# Altium PCB iCE5UL1-4K-SG48-DKE.PcbDoc
Units mm, origin at the board's own origin, x right, y up, seen from the top; angles counter-clockwise.
Board outline 80 x 100 mm, 2 copper layers (Top Layer, Bottom Layer); 112 components, 94 nets, 429 pads, 155 vias.
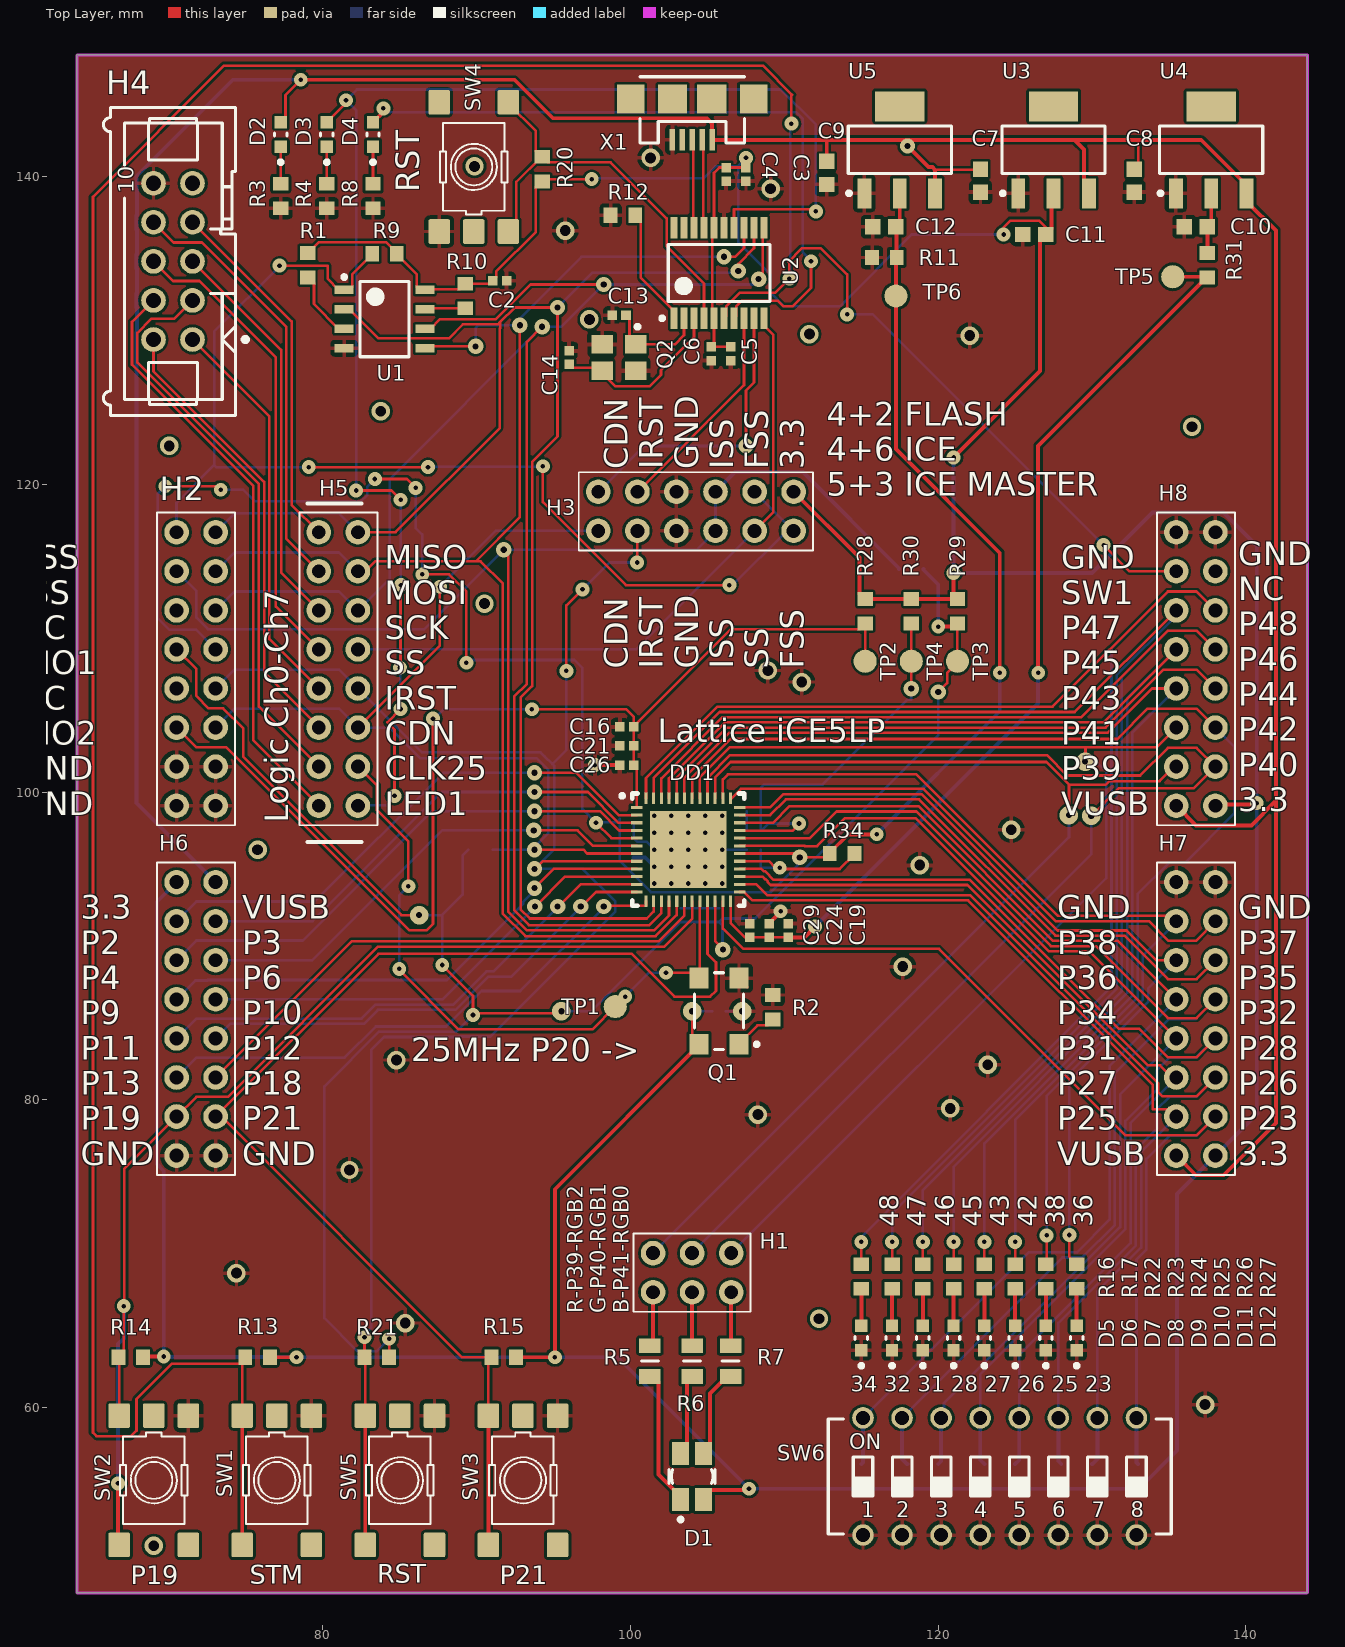
[diagram p0: Top Layer view]
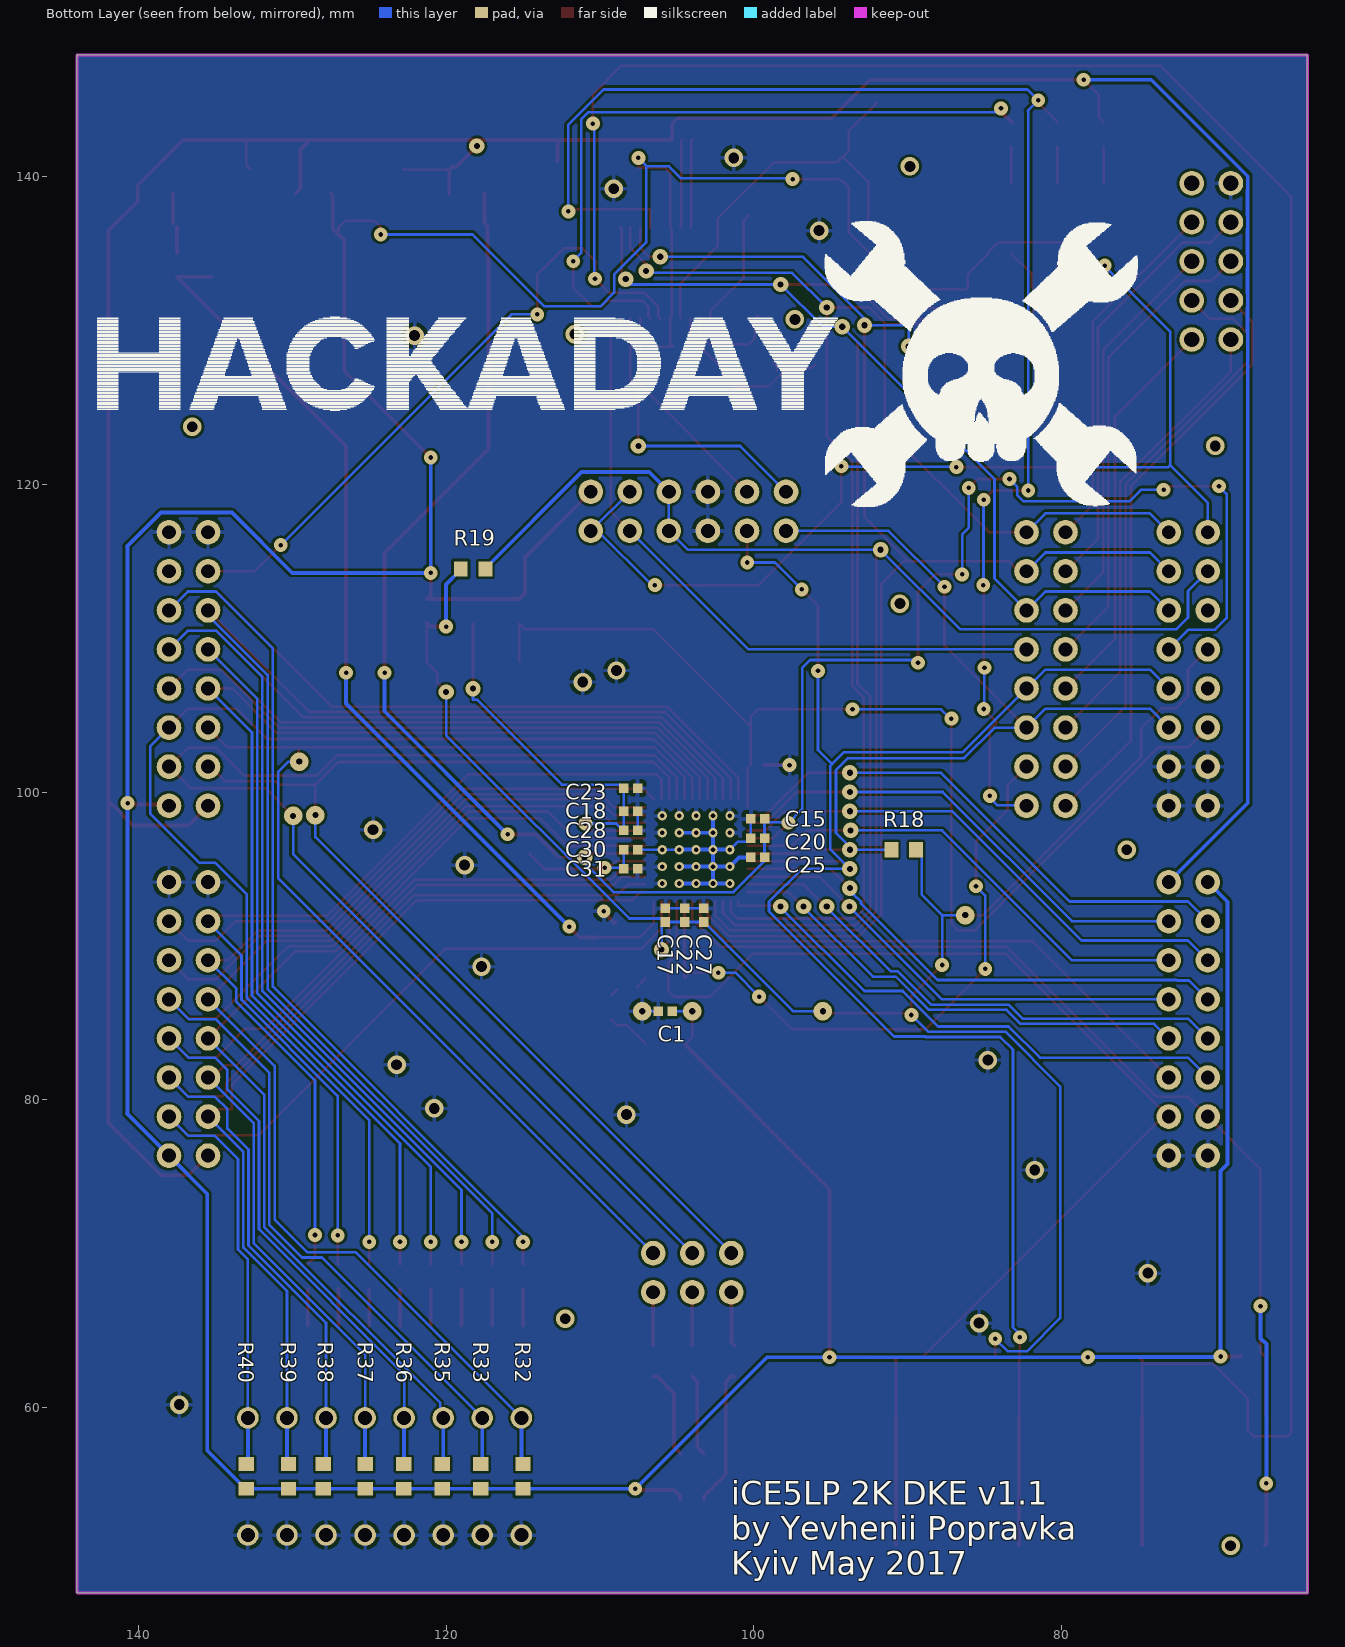
[diagram p1: Bottom Layer view, seen from below]
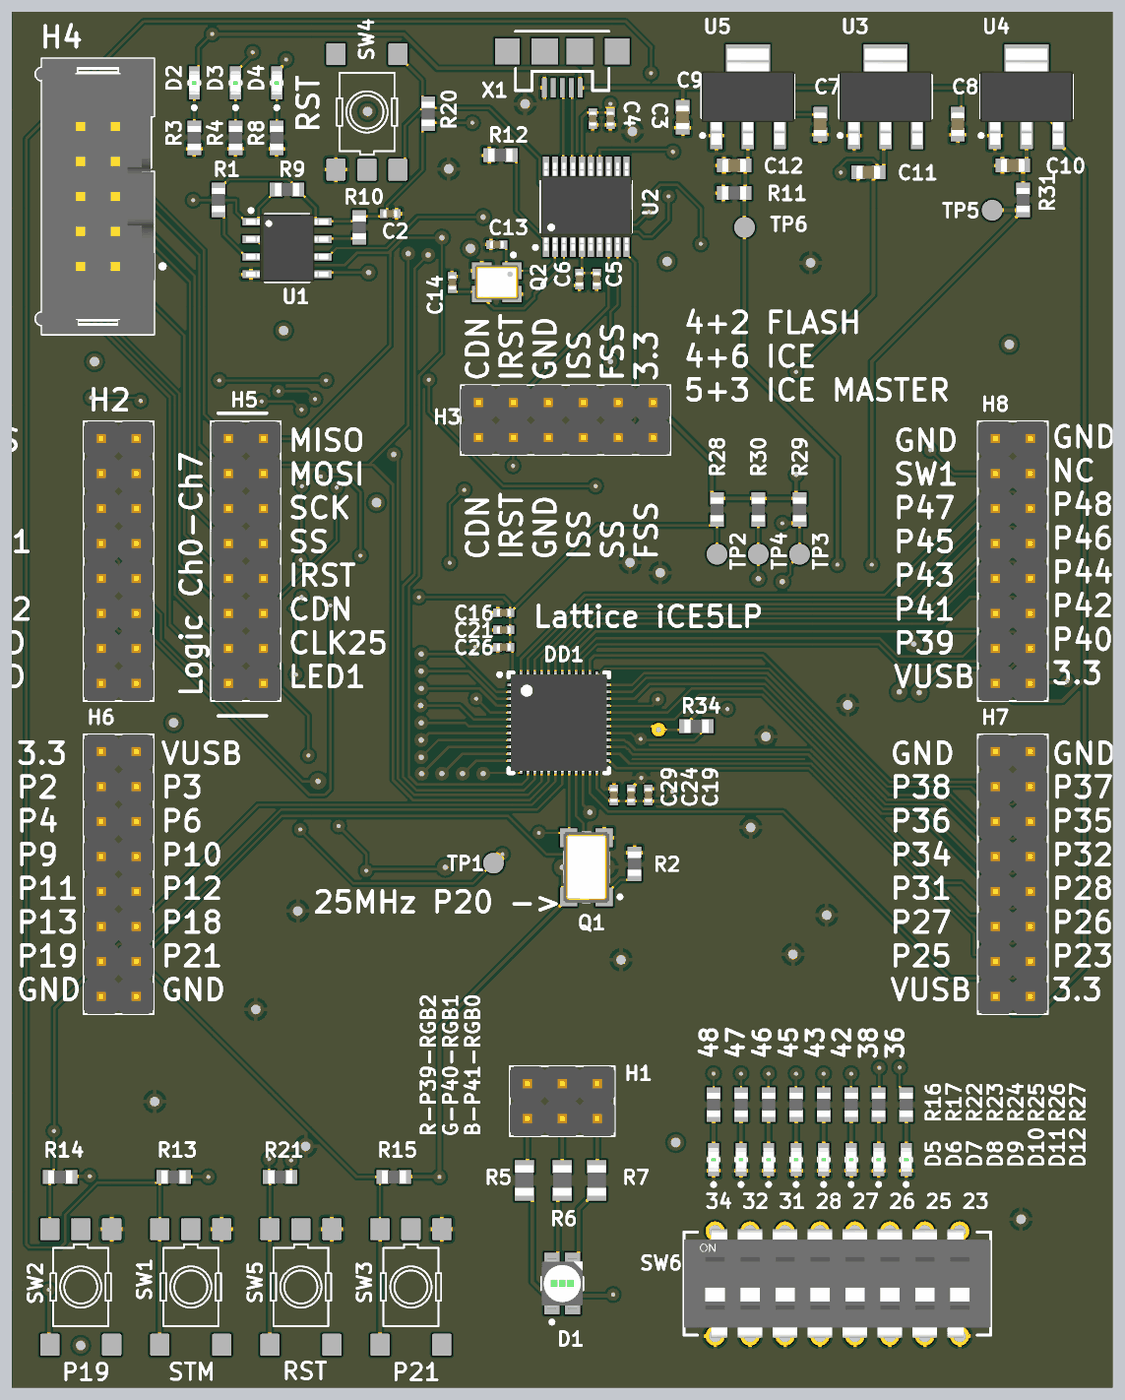
[diagram p2: 3D render of the assembled board from above, using the file's embedded part models]
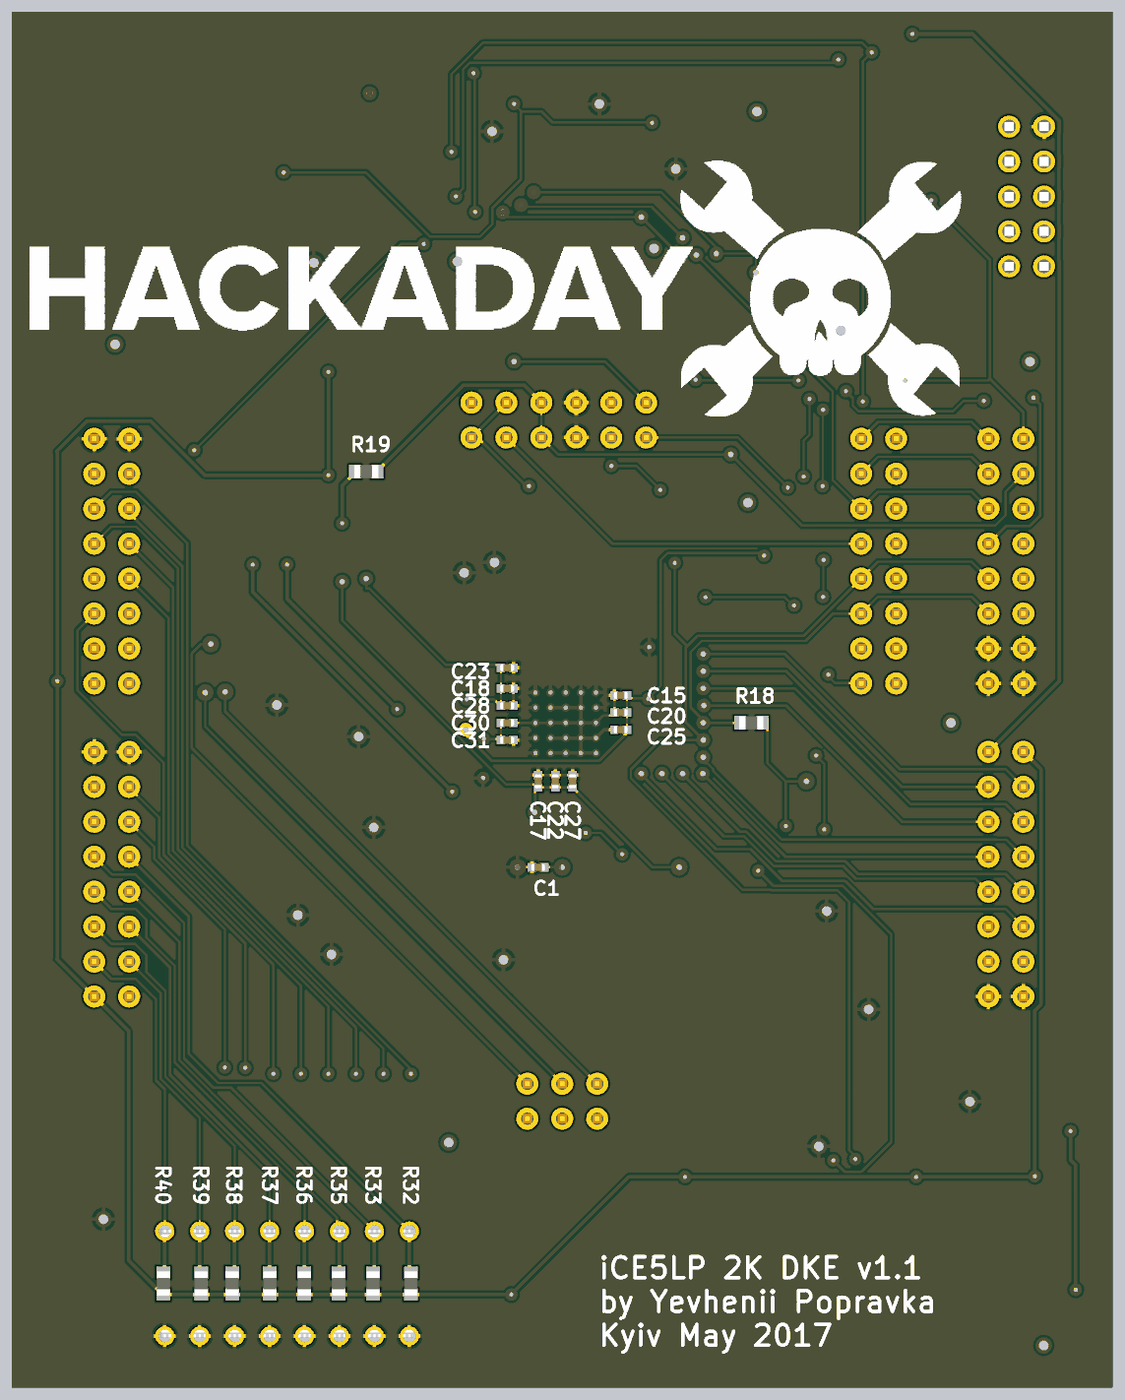
[diagram p3: 3D render of the assembled board from below, using the file's embedded part models]

## Layer stack, top to bottom
Top Solder: solder mask 0.0102, Solder Resist, Dk 3.5
Top Layer: signal copper 0.0356
Dielectric 1: dielectric 0.32, FR-4, Dk 4.8
Bottom Layer: signal copper 0.0356
Bottom Solder: solder mask 0.0102, Solder Resist, Dk 3.5

## Board outline
64,47.925 64,147.925 143.975,147.925 144,147.9 144,47.95 143.975,47.925

## Design rules (kind name [scope] priority, off if disabled: settings)
Clearance [All] p1: gap=0.17 ignorepadtopadclearanceinfootprint=FALSE
MinimumSolderMaskSliver [All] p1: minsoldermaskwidth=0.01
PolygonConnect [All] p1: connectstyle=Relief reliefconductorwidth=0.254 reliefentries=4 polygonreliefangle="90 Angle" airgapwidth=0.254
RoomDefinition Main [InComponentClass('Main')] p1: confinementstyle=ConfineIn formatcopy=TRUE lockcomponents=FALSE outline 53.8,22.874 810.567,22.874 810.567,159.526 53.8,159.526
RoutingVias [All] p1: holewidth=0.4 width=1 viastyle="Through Hole" minholewidth=0.3 minwidth=0.9 maxholewidth=0.4 maxwidth=1.2
SilkToSilkClearance [All] p1: silktosilkclearance=0.01
SilkToSolderMaskClearance [IsPad] p1: minsilkscreentomaskgap=0.01 clearancetoexposedcopper=TRUE
SolderMaskExpansion [All] p1: expansion=0.102
Width [All] p1: maxlimit=0.254 minlimit=0.17 preferedwidth=0.17
27 further rules are at their usual default settings.

## Components (designator, comment, footprint, x,y, rotation, side; value= is the part's Value field where it differs from the comment)
C1 "10n" CAPC1005X55N 105.75,85.75 r180 bottom
C2 "100n" CAPC1005X55N 91.5,133.25 r0 top
C3 "1u" CAPC1005X55N 107.5,140.15 r90 top
C4 "100n" CAPC1005X55N 106.225,140.15 r90 top
C5 "1u" CAPC1005X55N 106.5,128.5 r90 top
C6 "100n" CAPC1005X55N 105.25,128.5 r90 top
C7 "100n" CAPC1608X85N 122.75,139.75 r90 top
C8 "100n" CAPC1608X85N 132.75,139.75 r90 top
C9 "100n" CAPC1608X85N 112.75,140.25 r90 top
C10 "1u" CAPC1608X85N 136.75,136.75 r0 top
C11 "1u" CAPC1608X85N 126.25,136.25 r0 top
C12 "1u" CAPC1608X85N 116.5,136.75 r0 top
C13 "10p" CAPC1005X55N 99.25,131 r180 top
C14 "10p" CAPC1005X55N 96,128.25 r270 top
C15 "1u" CAPC1005X55N 99.75,98.25 r180 bottom
C16 "1u" CAPC1005X55N 99.75,104.25 r0 top
C17 "1u" CAPC1005X55N 105.75,92 r270 bottom
C18 "1u" CAPC1005X55N 108,98.75 r0 bottom
C19 "1u" CAPC1005X55N 110.25,91 r270 top
C20 "100n" CAPC1005X55N 99.75,97 r180 bottom
C21 "100n" CAPC1005X55N 99.75,103 r0 top
C22 "100n" CAPC1005X55N 104.5,92 r270 bottom
C23 "100n" CAPC1005X55N 108,100.25 r0 bottom
C24 "100n" CAPC1005X55N 109,91 r270 top
C25 "10n" CAPC1005X55N 99.75,95.75 r180 bottom
C26 "10n" CAPC1005X55N 99.75,101.75 r0 top
C27 "10n" CAPC1005X55N 103.25,92 r270 bottom
C28 "10n" CAPC1005X55N 108,97.5 r0 bottom
C29 "10n" CAPC1005X55N 107.75,91 r270 top
C30 "100n" CAPC1005X55N 108,96.25 r0 bottom
C31 "10n" CAPC1005X55N 108,95 r0 bottom
D1 "Red/Green/Blue" LED_CREE_CLV1A-FKB 104,55.5 r90 top
D2 "Green" LED_OSRAM_LGL29K 77.25,142.75 r90 top
D3 "Green" LED_OSRAM_LGL29K 80.25,142.75 r90 top
D4 "Green" LED_OSRAM_LGL29K 83.25,142.75 r90 top
D5 "Green" LED_OSRAM_LGL29K 115,64.5 r90 top
D6 "Green" LED_OSRAM_LGL29K 117,64.5 r90 top
D7 "Green" LED_OSRAM_LGL29K 119,64.5 r90 top
D8 "Green" LED_OSRAM_LGL29K 121,64.5 r90 top
D9 "Green" LED_OSRAM_LGL29K 123,64.5 r90 top
D10 "Green" LED_OSRAM_LGL29K 125,64.5 r90 top
D11 "Green" LED_OSRAM_LGL29K 127,64.5 r90 top
D12 "Green" LED_OSRAM_LGL29K 129,64.5 r90 top
DD1 "ICE5LP2K" QFN50P700X700X100_HS-49L 103.75,96.25 r0 top locked
H1 "H-2x3" J2x3 104,68.75 r0 top locked
H2 "H-2x8" J2x8 71.75,108 r90 top locked
H3 "H-2x6" J2x6 104.25,118.25 r180 top locked
H4 "Header 10" 3M_N2510-6002RB 70.25,134.5 r90 top
H5 "H-2x8" J2x8 81,108 r270 top locked
H6 "H-2x8" J2x8 71.75,85.25 r270 top locked
H7 "H-2x8" J2x8 136.75,85.25 r90 top locked
H8 "H-2x8" J2x8 136.75,108 r90 top locked
Q1 "25MHz" OSCCC320X500X160-4N 105.75,85.75 r180 top
Q2 "114.285MHZ" XTAL_CONNOR_CS 99.25,128.25 r270 top
R1 "10k" RESC1608X55N 79,134.25 r270 top
R2 "inf" RESC1608X55N 109.25,86 r270 top
R3 "1k" RESC1608X55N 77.25,138.75 r90 top
R4 "1k" RESC1608X55N 80.25,138.75 r90 top
R5 "470" RESC2012X60N 101.25,63 r90 top
R6 "470" RESC2012X60N 104,63 r90 top
R7 "470" RESC2012X60N 106.5,63 r90 top
R8 "1k" RESC1608X55N 83.25,138.75 r90 top
R9 "10k" RESC1608X55N 84,135 r0 top
R10 "10k" RESC1608X55N 89.25,132.25 r270 top
R11 "120" RESC1608X55N 116.5,134.75 r0 top
R12 "10k" RESC1608X55N 99.5,137.5 r0 top
R13 "10k" RESC1608X55N 75.75,63.25 r180 top
R14 "10k" RESC1608X55N 67.5,63.25 r180 top
R15 "10k" RESC1608X55N 91.75,63.25 r180 top
R16 "1k" RESC1608X55N 115,68.5 r270 top
R17 "1k" RESC1608X55N 117,68.5 r270 top
R18 "10k" RESC1608X55N 90.25,96.25 r0 bottom
R19 "10k" RESC1608X55N 118.25,114.5 r180 bottom
R20 "10k" RESC1608X55N 94.25,140.5 r90 top
R21 "10k" RESC1608X55N 83.5,63.25 r180 top
R22 "1k" RESC1608X55N 119,68.5 r270 top
R23 "1k" RESC1608X55N 121,68.5 r270 top
R24 "1k" RESC1608X55N 123,68.5 r270 top
R25 "1k" RESC1608X55N 125,68.5 r270 top
R26 "1k" RESC1608X55N 127,68.5 r270 top
R27 "1k" RESC1608X55N 129,68.5 r270 top
R28 "0" RESC1608X55N 115.25,111.75 r90 top
R29 "0" RESC1608X55N 121.25,111.75 r90 top
R30 "0" RESC1608X55N 118.25,111.75 r90 top
R31 "0" RESC1608X55N 137.5,134.25 r90 top
R32 "10k" RESC1608X55N 115,55.5 r90 bottom
R33 "10k" RESC1608X55N 117.75,55.5 r90 bottom
R34 "100" RESC1608X55N 113.75,96 r180 top
R35 "10k" RESC1608X55N 120.25,55.5 r90 bottom
R36 "10k" RESC1608X55N 122.75,55.5 r90 bottom
R37 "10k" RESC1608X55N 125.25,55.5 r90 bottom
R38 "10k" RESC1608X55N 128,55.5 r90 bottom
R39 "10k" RESC1608X55N 130.25,55.5 r90 bottom
R40 "10k" RESC1608X55N 133,55.5 r90 bottom
SW1 "TS42 Dongnan Electronics Tact switch VDC 12V - 50mA" TS42 77,55.25 r270 top
SW2 "TS42 Dongnan Electronics Tact switch VDC 12V - 50mA" TS42 69,55.25 r270 top
SW3 "TS42 Dongnan Electronics Tact switch VDC 12V - 50mA" TS42 93,55.25 r270 top
SW4 "TS42 Dongnan Electronics Tact switch VDC 12V - 50mA" TS42 89.806,140.641 r90 top
SW5 "TS42 Dongnan Electronics Tact switch VDC 12V - 50mA" TS42 85,55.25 r270 top
SW6 "Switch" SW_TYCO_1825057-7 124,55.5 r90 top
TP1 "TP" "TP no hole" 99,86.05 r0 top
TP2 "TP" "TP no hole" 115.25,108.5 r90 top
TP3 "TP" "TP no hole" 121.25,108.5 r90 top
TP4 "TP" "TP no hole" 118.25,108.5 r90 top
TP5 "TP" "TP no hole" 135.25,133.5 r90 top
TP6 "TP" "TP no hole" 117.25,132.25 r90 top
U1 "M25P80" SOIC127P600X175-8L 84,130.75 r0 top
U2 "STM32F070" SOP127P600-8N 105.75,133.75 r90 top
U3 "LD1117V33" SOT230P700X180-4L 127.5,141.75 r90 top
U4 "LD1117V33" SOT230P700X180-4L 137.75,141.75 r90 top
U5 "LD1117V33" SOT230P700X180-4L 117.5,141.75 r90 top
X1 "uUSB" USB-MICROB 104,145.05 r180 top

## Footprints (in the part's own frame and the unit in brackets; to place one, negate y for a bottom-side part, rotate by r counter-clockwise, add the part's x,y. Pads: shape width x height; smd on the part's side, far side on the other; paste and mask are expansions set on the pad)
3M_N2510-6002RB [mm] "10 Contacts - Straight .100\" x .100\" Low Profile Four-Wall Header"
  round 1.6 hole 1: 1(-5.08,-1.27) 2(-5.08,1.27) 3(-2.54,-1.27) 4(-2.54,1.27) 5(0,-1.27) 6(0,1.27) 7(2.54,-1.27) 8(2.54,1.27) 9(5.08,-1.27) 10(5.08,1.27)
  silkscreen extent -10.01,-4.85 10.01,4.52, body extent -10.01,-4.11 10.01,4.52, height 9.91
CAPC1005X55N [mm] "Chip Capacitor, Body 1.0x0.55mm, IPC Medium Density"
  rect 0.62x0.62 smd: 1(-0.45,0) 2(0.45,0)
  body extent -0.52,-0.27 0.53,0.28, height 0.55
CAPC1608X85N [mm] "Chip Capacitor, Body 1.6x0.8mm IPC Medium Density"
  rect 1x1 smd: 1(-0.75,0) 2(0.75,0)
  body extent -0.87,-0.47 0.88,0.48, height 0.85
J2x3 [mm]
  round 1.6 hole 0.9: 1(-2.54,-1.27) 2(-2.54,1.27) 3(0,-1.27) 4(0,1.27) 5(2.54,-1.27) 6(2.54,1.27)
  silkscreen extent -3.81,-2.54 3.81,2.54, body extent -3.81,-2.54 3.81,2.54, height 10.1
J2x6 [mm]
  round 1.6 hole 0.9: 1(-6.35,-1.27) 2(-6.35,1.27) 3(-3.81,-1.27) 4(-3.81,1.27) 5(-1.27,-1.27) 6(-1.27,1.27) 7(1.27,-1.27) 8(1.27,1.27) 9(3.81,-1.27) 10(3.81,1.27) 11(6.35,-1.27) 12(6.35,1.27)
  silkscreen extent -7.62,-2.54 7.62,2.54, body extent -7.62,-2.54 7.62,2.54, height 10.1
J2x8 [mm]
  round 1.6 hole 0.9: 1(-8.89,-1.27) 2(-8.89,1.27) 3(-6.35,-1.27) 4(-6.35,1.27) 5(-3.81,-1.27) 6(-3.81,1.27) 7(-1.27,-1.27) 8(-1.27,1.27) 9(1.27,-1.27) 10(1.27,1.27) 11(3.81,-1.27) 12(3.81,1.27) 13(6.35,-1.27) 14(6.35,1.27) 15(8.89,-1.27) 16(8.89,1.27)
  silkscreen extent -10.16,-2.54 10.16,2.54, body extent -10.16,-2.54 10.16,2.54, height 10.1
LED_CREE_CLV1A-FKB [mm] "PLCC4 3 in 1 Surface Mount Red/Green/Blue LED With Black Top Surface, Body 3.2mm X 2.8mm"
  rect 1.5x1.1 smd: 1(-1.5,0.75) 2(-1.5,-0.75) 3(1.5,-0.75) 4(1.5,0.75)
  silkscreen extent -2.92,-1.5 0.45,1.5, body extent -1.85,-1.5 1.85,1.5, height 2.1
LED_OSRAM_LGL29K [mm] "Green Chip LED, 2-Leads, Body 1.7x0.8mm, IPC Medium Density"
  rect 0.8x0.8 smd: 1(-0.8,0) 2(0.8,0)
  silkscreen extent -1.92,-0.4 0.1,0.4, body extent -0.85,-0.4 0.85,0.4, height 0.67
OSCCC320X500X160-4N [mm] "SMD Oscillator, Corner Convave, 4 pins, 5x3.2mm"
  rect 1.25x1.35 smd: 1(-1.3,2.15) 2(-1.3,-2.15) 3(1.3,-2.15) 4(1.3,2.15)
  silkscreen extent -2.58,-2.5 1.6,2.5, body extent -1.67,-2.57 1.68,2.58, height 1.6
QFN50P700X700X100_HS-49L [mm] "QFN, 48-Leads, Body 7.00x7.00mm, Pitch 0.50mm, Thermal Pad 5.40x5.40mm, IPC High Density"
  rect 0.75x0.2 smd: 1(-3.35,2.75) 2(-3.35,2.25) 3(-3.35,1.75) 4(-3.35,1.25) 5(-3.35,0.75) 6(-3.35,0.25) 7(-3.35,-0.25) 8(-3.35,-0.75) 9(-3.35,-1.25) 10(-3.35,-1.75) 11(-3.35,-2.25) 12(-3.35,-2.75) 25(3.35,-2.75) 26(3.35,-2.25) 27(3.35,-1.75) 28(3.35,-1.25) 29(3.35,-0.75) 30(3.35,-0.25) 31(3.35,0.25) 32(3.35,0.75) 33(3.35,1.25) 34(3.35,1.75) 35(3.35,2.25) 36(3.35,2.75)
  rect 0.2x0.75 smd: 13(-2.75,-3.35) 14(-2.25,-3.35) 15(-1.75,-3.35) 16(-1.25,-3.35) 17(-0.75,-3.35) 18(-0.25,-3.35) 19(0.25,-3.35) 20(0.75,-3.35) 21(1.25,-3.35) 22(1.75,-3.35) 23(2.25,-3.35) 24(2.75,-3.35) 37(2.75,3.35) 38(2.25,3.35) 39(1.75,3.35) 40(1.25,3.35) 41(0.75,3.35) 42(0.25,3.35) 43(-0.25,3.35) 44(-0.75,3.35) 45(-1.25,3.35) 46(-1.75,3.35) 47(-2.25,3.35) 48(-2.75,3.35)
  rect 5x5 smd: 49(0,0)
  silkscreen extent -4.42,-3.65 3.65,3.65, body extent -3.55,-3.55 3.55,3.55, height 1
RESC1608X55N [mm] "Chip Resistor, EIA 0603, Metric 1608, Body 1.6x0.8mm, IPC Medium Density"
  rect 0.9x1 smd: 1(-0.8,0) 2(0.8,0)
  body extent -0.87,-0.47 0.88,0.48, height 0.55
RESC2012X60N [mm] "Chip Resistor, EIA 0805, Metric 2012, Body 2.0x1.2mm, IPC Medium Density"
  rect 0.95x1.4 smd: 1(-1,0) 2(1,0)
  silkscreen extent 0,-0.55 0,0.55, body extent -1.1,-0.67 1.1,0.68, height 0.6
SOIC127P600X175-8L [mm] "SOIC, 8-Leads, Body 4.85x3.90mm, Pitch 1.27mm, IPC High Density"
  rect 1.25x0.55 smd: 1(-2.625,1.905) 2(-2.625,0.635) 3(-2.625,-0.635) 4(-2.625,-1.905) 5(2.625,-1.905) 6(2.625,-0.635) 7(2.625,0.635) 8(2.625,1.905)
  silkscreen extent -2.75,-2.45 1.6,2.85, body extent -3,-2.45 3,2.45, height 1.75
SOP127P600-8N [mm]
  rect 1.4x0.45 smd: 1(-2.95,2.925) 2(-2.95,2.275) 3(-2.95,1.625) 4(-2.95,0.975) 5(-2.95,0.325) 6(-2.95,-0.325) 7(-2.95,-0.975) 8(-2.95,-1.625) 9(-2.95,-2.275) 10(-2.95,-2.925) 11(2.95,-2.925) 12(2.95,-2.275) 13(2.95,-1.625) 14(2.95,-0.975) 15(2.95,-0.325) 16(2.95,0.325) 17(2.95,0.975) 18(2.95,1.625) 19(2.95,2.275) 20(2.95,2.925)
  silkscreen extent -3.07,-3.3 1.85,3.82, body extent -3.2,-3.3 3.2,3.3, height 1.2
SOT230P700X180-4L [mm] "SOT223, 4-Leads, Body 6.50x7.00mm (avg), Pitch 2.30mm, IPC High Density"
  rect 1.95x0.9 smd: 1(-2.825,2.3) 2(-2.825,0) 3(-2.825,-2.3)
  rect 1.95x3.2 smd: 4(2.825,0)
  silkscreen extent -2.95,-3.35 1.55,3.42, body extent -3.5,-3.35 3.5,3.35, height 1.8
SW_TYCO_1825057-7 [mm] "Body 22.3x7.5mm, 8 Ways SPST DIP Switch, Thru Hole, TYCO AD Series"
  round 1.4 hole 0.9: 1(-3.81,8.89) 2(-3.81,6.35) 3(-3.81,3.81) 4(-3.81,1.27) 5(-3.81,-1.27) 6(-3.81,-3.81) 7(-3.81,-6.35) 8(-3.81,-8.89) 9(3.81,-8.89) 10(3.81,-6.35) 11(3.81,-3.81) 12(3.81,-1.27) 13(3.81,1.27) 14(3.81,3.81) 15(3.81,6.35) 16(3.81,8.89)
  silkscreen extent -3.75,-11.15 3.75,11.15, body extent -3.93,-11.15 3.94,11.15, height 5.5
"TP no hole" [mm]
  round 1.5 smd: 1(0,0)
TS42 [mm]
  rrect15% 1.6x1.4 smd: 1(-4.2,2.25) 2(4.2,2.25) 3(-4.2,-2.25) 4(4.2,-2.25) 5(-4.2,0)
  silkscreen extent -3.1,-2.2 2.85,2.2
USB-MICROB [mm]
  rect 0.35x1.4 smd: 1(-1.3,2.65) 2(-0.65,2.65) 3(0,2.65) 4(0.65,2.65) 5(1.3,2.65)
  rect 1.8x1.9 smd: MT1(-4,0) MT2(4,0)
  rect 1.9x1.9 smd: P$1(-1.27,0) P$2(1.27,0)
  silkscreen extent -3.4,-1.45 3.4,2.85
XTAL_CONNOR_CS [mm] "4 Pins, 2.5x3.2mm, SMD Sealing Crystal, CS Serie"
  rect 1.2x1.4 smd: 1(-0.85,1.1) 2(-0.85,-1.1) 3(0.85,-1.1) 4(0.85,1.1)
  silkscreen extent -2.12,1.08 -1.88,1.33, body extent -1.25,-1.6 1.25,1.6, height 0.8

## Part data
C1 C2 C3 C4 C5 C6 C13 C14 C15 C16 C17 C18 C19 C20 C21 C22 C23 C24 C25 C26 C27 C28 C29 C30 C31: library part CC0402_470NF_6.3V_10%_X5R, "Non-polarised capacitor"
C7 C8 C9 C10 C11 C12: library part CPPS0603_2.2NF_16V_5%_PANASONIC_ECHU(X), "Non-polarised capacitor"
D1: library part LED_CREE_CLV1A-FKB-CJ1M1F1BB7R4S3, "Tricolor (RGB) PLCC4 Surface Mount LED With Black Top Surface"
D2 D3 D4 D5 D6 D7 D8 D9 D10 D11 D12: library part "LED_OSRAM_LG L29K-G2J1-24-Z", "LED Green 1C 2A"
DD1: library part iCE40UL2K-SG48, "iCE40UL2K-SG48"
H4: library part 3M_N2510-6002RB, "Connector 10 Male"
Q1: library part OSC_25MHZ_MERCURY_VM53S3-25.000-2.5/-30+75, "Oscillator 4 pins 1=VC 2=GND 3=OUT 4=+Vs"
Q2: library part XTAL_114.285MHZ_CONNOR_CS-018, "Crystal 4 pins 1=XTAL Control 2=GND3=XTAL 4=GND"
R1 R2 R3 R4 R8 R9 R10 R11 R12 R13 R14 R15 R16 R17 R18 R19 R20 R21 R22 R23 R24 R25 R26 R27 R28 R29 R30 R31 R32 R33 R34 R35 R36 R37 R38 R39 R40: library part R0603_2K7_1%_0.1W_100PPM, "Resistor - 1%"
R5 R6 R7: library part R0805_6R8_1%_0.125W_200PPM, "Resistor - 1%"
SW1 SW2 SW3 SW4 SW5: library part TS42
SW6: library part SW_TYCO_1825057-7, "8 Ways SPST DIP Switch"
U2: library part STM32F070F4P6, "ARM Cortex-M0 32-bit MCU, 32 KB Flash, 4 KB Internal RAM, 15 I/Os, 20-pin TSSOP, -40 to 85 degC, Tube"
U3 U4 U5: "LD1117V33 3.3V Voltage regulator"
X1: library part usb, "micro USB"

## Via types
v1: diameter 0.9, hole 0.3, Top Layer to Bottom Layer, tented both sides, 70 vias
v2: diameter 1.2, hole 0.7, Top Layer to Bottom Layer, tented both sides, 27 vias
v3: diameter 1, hole 0.4, Top Layer to Bottom Layer, tented both sides, 25 vias
v4: diameter 0.6, hole 0.3, Top Layer to Bottom Layer, tented both sides, 25 vias
v5: diameter 1.2, hole 0.4, Top Layer to Bottom Layer, tented both sides, 7 vias
v6: diameter 1, hole 0.4, Top Layer to Bottom Layer, 1 vias

## Nets (pads, with @x,y where several pads share a name; then routed paths per layer and width w, separated by ;. In a path a pad name is that pad's centre, name@x,y a point inside that pad or via, vN(x,y) a via of type N, cw(c..) or ccw(c..) an arc to the next point about the centre after c; other vN are vias at no path point)
2.5V: C10.2 R31.2 U4.2 | length 3.6
  Top Layer w0.254: R31.2 C10.2 ; C10.2@137.75,137 U4.2
3.3V: C1.2 C2.1 C3.2 C4.2 C5.2 C6.2 C11.2 D1.2 H3.1 H6.1 H7.1 H8.1 Q1.4 R1.1 R9.2 R10.1 R13.1 R14.1 R15.1 R20.1 R28.2 R29.2 R30.2 R32.1 R33.1 R35.1 R36.1 R37.1 R38.1 R39.1 R40.1 U1.8 U2.5 U2.16 U3.2 | length 350.6
  Top Layer w0.17: R1.1 79.05,135.05 79.755,135.755 84.095,135.755 84.8,135.05 R9.2 84.8,134.95 86.085,133.665 86.085,132.845 86.275,132.655 U1.8 86.655,132.685 88.885,132.685 R10.1 90.85,133.05 C2.1 91.275,133.475 91.275,133.861 93.835,136.421 93.835,139.335 94.2,139.7 R20.1 94.45,139.9 94.5,139.85 v1(97.475,139.85) ; v5(104,85.75) 104,84.05 Q1.4 ; C5.2 C6.2 105.425,129.125 U2.5 105.32,130.905 105.32,136.595 U2.16 105.425,140.25 105.775,140.6 C4.2 C3.2 ; v1(124.25,136.25) 124.25,136.7 124.7,137.15 126.55,137.15 127,136.7 C11.2
  Top Layer w0.254: R14.1@68.35,63.3 v1(69.65,63.3) ; R13.1 v1(78.275,63.25) ; R15.1 v1(95.075,63.25) 95.075,74.175 104.45,83.55 Q1.4 ; D1.2 104.75,54.2 105.173,54.623 107.623,54.623 v1(107.7,54.7) ; H3.1 114.877,115.243 114.877,112.873 114.927,112.873 R28.2 R30.2 R29.2 121,112.8 v1(121,114.25) ; v1(121,121.75) 126.627,127.377 126.627,135.877 C11.2 127.373,136.623 127.373,138.798 U3.2 ; H8.1 138.09,99.18 140.68,99.18 140.707,99.207 v1(140.707,99.28)
  Bottom Layer w0.17: v1(97.475,139.85) 97.52,139.895 104.733,139.895 105.512,140.675 107,140.675 ; v5(104,85.75) C1.2 ; v1(107.5,141.225) 107,140.725 107,140.675 ; v1(124.25,136.25) 118.278,136.25 113.603,131.575 109.97,131.575 109.08,132.465 109.08,133.663 107,135.743 107,140.675
  Bottom Layer w0.254: H6.1 69.203,92.863 69.203,75.803 69.65,75.356 v1(69.65,63.3) 69.675,63.275 78.25,63.275 v1(78.275,63.25) v1(95.075,63.25) 99.15,63.25 v1(107.7,54.7) R32.1 R33.1 R35.1 R36.1 R37.1 R38.1 R39.1 R40.1 133.05,54.7 135.529,57.179 135.529,73.869 H7.1 140.75,79.09 140.707,79.133 v1(140.707,99.28) 140.707,115.923 140.75,115.966 138.549,118.167 133.923,118.167 130.006,114.25 v1(121,114.25) v1(121,121.75)
CDONE: H3.11 U2.9 | length 19.4
  Top Layer w0.17: v3(107.5,122.5) 107.5,126.099 108.025,126.624 U2.9
  Bottom Layer w0.17: H3.11 100.88,122.5 v3(107.5,122.5)
CLK_25M: DD1.20 H5.14 Q1.3 TP1.1 | length 42.6
  Top Layer w0.17: H5.14 83.504,100.416 83.504,98.832 85.55,96.785 v1(85.55,93.875) ; v1(84.954,88.504) 84.954,88.446 88.825,84.575 97.525,84.575 TP1.1 v1(99.65,86.7) ; v1(102.3,88.25) 104.1,88.25 Q1.3 104.5,87.95 DD1.20
  Bottom Layer w0.17: v1(84.954,88.504) 84.954,93.271 84.95,93.275 v1(85.55,93.875) ; v1(99.65,86.7) 101.2,88.25 v1(102.3,88.25)
CRESET: H3.9 U2.8 | length 14.2
  Top Layer w0.17: H3.9 107.375,126.455 U2.8
FLASH_CSN: H2.16 H3.2 H3.3 R9.1 U1.1 | length 76.1
  Top Layer w0.17: v1(77.175,134.225) 80.3,134.225 80.3,133.38 81.025,132.655 U1.1 81.725,132.655 81.915,132.845 81.915,133.665 83.2,134.95 R9.1 ; v1(79.075,121.125) v1(86.825,121.125) ; v1(94.3,121.175) 94.3,118.848 99.698,113.45 v1(106.425,113.45)
  Bottom Layer w0.17: H2.16 70.48,118.805 72.925,121.25 ; v1(77.175,134.225) 77.175,134.175 72.925,129.925 72.925,121.25 ; v1(79.075,121.125) 73.05,121.125 72.925,121.25 ; v1(86.825,121.125) 86.85,121.15 94.275,121.15 v1(94.3,121.175) ; v1(106.425,113.45) 106.623,113.45 110.153,116.98 H3.2 H3.3
GND: C1.1 C2.2 C3.1 C4.1 C5.1 C6.1 C7.1 C8.1 C9.1 C10.1 C11.1 C12.1 C13.2 C14.1 C15.1 C16.1 C17.1 C18.1 C19.1 C20.1 C21.1 C22.1 C23.1 C24.1 C25.1 C26.1 C27.1 C28.1 C29.1 C30.1 C31.1 D5.1 D6.1 D7.1 D8.1 D9.1 D10.1 D11.1 D12.1 DD1.49 H2.1 H2.2 H2.3 H2.4 H3.7 H3.8 H4.10 H6.15 H6.16 H7.15 H7.16 H8.15 H8.16 Q1.2 Q2.2 Q2.4 R2.1 R3.1 R4.1 R8.1 R11.1 R12.1 SW1.1 SW2.1 SW3.1 SW4.1 SW5.1 SW6.1 SW6.2 SW6.3 SW6.4 SW6.5 SW6.6 SW6.7 SW6.8 U1.4 U2.15 U3.1 U4.1 U5.1 X1.5 | length 32.3
  Top Layer w0.17: Q1.2 107.25,87.7 107.25,87.65 Q1.2@107.59,87.31 ; R2.1@108.885,87.165 R2.1
  Top Layer w0.254: v1(97.675,101.75) C26.1 ; C24.1@109,91.525 109.075,91.525 109.75,92.2 v1(109.75,92.25)
  Bottom Layer w0.17: C15.1@100.2,98 C20.1 100.425,96.775 101.025,96.775 v4(101.55,96.25) ; C27.1 C22.1 C17.1 ; v4(104.85,96.25) v4(105.95,96.25) C30.1 ; C1.1 v5(107.25,85.75) ; C28.1 C18.1
  Bottom Layer w0.254: C25.1 100.95,95.75 v4(101.55,95.15) v4(102.65,95.15) ; v4(101.55,94.05) v4(102.65,94.05) ; v4(101.55,96.25) v4(102.65,96.25) ; v4(102.65,98.45) v4(102.65,97.35) ; v4(104.85,94.05) v4(103.75,94.05) v4(102.65,94.05) ; v4(104.85,95.15) v4(103.75,95.15) v4(102.65,95.15) ; v4(104.85,96.25) v4(103.75,96.25) v4(102.65,96.25) ; v4(104.85,97.35) v4(103.75,97.35) v4(102.65,97.35) ; v4(102.65,94.05) v4(102.65,95.15) ; v4(102.65,95.15) v4(102.65,96.25) ; v4(102.65,96.25) v4(102.65,97.35)
  other v2: 137.35,60.175 85.35,65.475 74.375,68.725 81.725,75.425 108.275,79.025 120.775,79.425 123.225,82.275 84.775,82.575 117.7,88.65 118.8,95.25 124.75,97.55 111.125,107.15 108.925,107.9 122.05,129.675 95.75,136.5 109.1,139.225 101.3,141.225
  other v4: 105.95,94.05 105.95,95.15 101.55,97.35 105.95,97.35 101.55,98.45 103.75,98.45 104.85,98.45 105.95,98.45
ICE5_CDONE: DD1.7 H2.5 H3.12 H5.12 R18.2 | length 62
  Top Layer w0.17: H5.12 87.6,109.52 v1(87.6,113.35) ; v3(93.75,96.25) 96.925,96.25 97.175,96 DD1.7
  Bottom Layer w0.17: H2.5 74.245,105.415 81.045,105.415 H5.12 84.329,104.19 86.319,102.2 93.868,102.2 94.65,101.418 94.65,97.332 93.75,96.432 v3(93.75,96.25) R18.2 ; v1(87.6,113.35) 91.23,116.98 H3.12
ICE5_CRESET: DD1.8 H2.7 H3.10 H5.10 R21.2 SW5.3 SW5.4 | length 116.4
  Top Layer w0.17: v1(82.7,64.55) R21.2 82.75,63.2 SW5.3 ; v3(93.75,95) 93.818,95 94.318,95.5 DD1.8 ; v1(95.825,107.875) 95.825,112.125 v1(96.875,113.175) ; v1(100.425,114.925) 100.432,114.933 100.432,116.958 H3.10@100.425,116.965
  Top Layer w0.254: SW5.4 SW5.3
  Bottom Layer w0.17: H2.7 74.245,107.955 81.045,107.955 H5.10 86.425,102.575 94.153,102.575 94.413,102.315 94.914,101.814 ; v1(82.7,64.55) 82.7,64.748 83.145,65.193 83.145,83.245 83.975,84.075 88.806,84.075 88.836,84.105 90.88,84.105 99.01,92.234 99.01,92.867 96.877,95 v3(93.75,95) 95.025,96.275 95.025,101.703 94.914,101.814 ; v1(95.825,107.875) 95.825,102.725 94.914,101.814 ; v1(96.875,113.175) 98.625,114.925 v1(100.425,114.925)
ICE5_CSN: DD1.16 H2.14 H3.5 H3.6 R19.2 | length 93.8
  Top Layer w0.17: v3(91.75,115.75) 91.75,115.691 92.04,115.401 92.04,92.223 93.253,91.01 101.529,91.01 102.5,91.981 DD1.16
  Bottom Layer w0.17: H2.14 71.765,113.065 71.765,111.333 72.513,110.585 86.585,110.585 v3(91.75,115.75) 104.29,115.75 H3.6 H3.5
  Bottom Layer w0.254: H3.5 106.797,120.797 111.203,120.797 117.45,114.55 R19.2
IO0: DD1.46 H8.9 R22.1 | length 93.2
  Top Layer w0.17: DD1.46 102,100.875 105.99,104.865 129.3,104.865 134.93,110.495 136.795,110.495 H8.9 ; R22.1 v1(119,70.75)
  Bottom Layer w0.17: v1(119,70.75) 119,74.113 131.945,87.058 131.945,107.467 134.973,110.495 136.795,110.495 H8.9
IO2: DD1.47 H8.12 R17.1 | length 90
  Top Layer w0.17: DD1.47 101.5,100.919 105.786,105.205 128.875,105.205 H8.12 ; R17.1 v1(117,70.75)
  Bottom Layer w0.17: v1(117,70.75) 117,72.594 131.605,87.199 131.605,107.608 135.48,111.483 H8.12
IO3: DD1.44 H8.7 | length 39.8
  Top Layer w0.17: DD1.44 103,100.913 106.272,104.185 130.876,104.185 134.646,107.955 136.795,107.955 H8.7
IO4: DD1.48 H8.11 R16.1 | length 99.4
  Top Layer w0.17: DD1.48 101,100.9 105.645,105.545 127.44,105.545 134.93,113.035 136.795,113.035 H8.11 ; R16.1 v1(115,70.75)
  Bottom Layer w0.17: v1(115,70.75) 115,71.075 131.265,87.34 131.265,109.327 134.973,113.035 136.795,113.035 H8.11
IO5: DD1.45 H8.10 R23.1 | length 83.7
  Top Layer w0.17: DD1.45 102.5,100.894 106.131,104.525 130.735,104.525 H8.10 ; R23.1 v1(121,70.75)
  Bottom Layer w0.17: v1(121,70.75) 121,75.632 132.285,86.918 132.285,106.075 H8.10
IO6: DD1.2 H6.3 | length 35.1
  Top Layer w0.17: v3(93.75,101.25) 96.474,101.25 99.224,98.5 DD1.2
  Bottom Layer w0.17: H6.3 71.765,92.885 79.46,92.885 87.825,101.25 v3(93.75,101.25)
IO8: DD1.4 H6.5 | length 34.5
  Top Layer w0.17: v3(93.75,98.75) 97.997,98.75 99.247,97.5 DD1.4
  Bottom Layer w0.17: H6.5 71.765,90.345 78.69,90.345 87.095,98.75 v3(93.75,98.75)
IO9: DD1.3 H6.4 | length 31.7
  Top Layer w0.17: v3(93.75,100) 97.228,100 99.228,98 DD1.3
  Bottom Layer w0.17: H6.4 79.32,91.6 87.72,100 v3(93.75,100)
IO13: DD1.6 H6.6 | length 31.3
  Top Layer w0.17: v3(93.705,97.505) 96.545,97.505 97.55,96.5 DD1.6
  Bottom Layer w0.17: H6.6 79.3,89.06 87.745,97.505 v3(93.705,97.505)
IO16: DD1.9 H6.7 | length 33.7
  Top Layer w0.17: v3(93.75,93.75) 95,95 DD1.9
  Bottom Layer w0.17: H6.7 71.705,87.745 72.47,87.745 72.5,87.775 84.756,87.775 88.05,87.775 93.025,92.75 93.025,92.867 93.467,93.31 93.585,93.31 93.75,93.475 v3(93.75,93.75)
IO18: DD1.10 H6.8 | length 30.7
  Top Layer w0.17: v3(93.78,92.555) 93.805,92.555 95.75,94.5 DD1.10
  Bottom Layer w0.17: H6.8 87.77,86.52 93.78,92.53 v3(93.78,92.555)
IO20: DD1.11 H6.9 | length 34.1
  Top Layer w0.17: v3(95.255,92.555) 95.305,92.555 96.75,94 DD1.11
  Bottom Layer w0.17: H6.9 71.765,85.265 82.515,85.265 83.43,86.18 88.471,86.18 90.627,88.336 91.086,88.336 95.255,92.505 v3(95.255,92.555)
IO22: DD1.12 H6.10 | length 31.4
  Top Layer w0.17: v3(96.755,92.555) 96.805,92.555 97.75,93.5 DD1.12
  Bottom Layer w0.17: H6.10 73.965,84.925 82.656,84.925 83.571,85.84 88.612,85.84 90.768,87.996 92.246,87.996 96.755,92.505 v3(96.755,92.555)
IO23: DD1.21 H6.14 R15.2 SW3.3 SW3.4 | length 81
  Top Layer w0.17: SW3.3 90.75,63.05 R15.2 89.05,63.25 73.4,78.9 H6.14 83.595,89.475 100.078,89.475 102.853,86.7 105.175,86.7 105.55,87.075 105.55,88.925 105,89.475 DD1.21
  Top Layer w0.254: SW3.4 SW3.3
IO24: DD1.13 H6.11 | length 35.4
  Top Layer w0.17: v3(98.255,92.555) 98.31,92.61 DD1.13@100.985,92.61 ; DD1.13@101,92.625 DD1.13
  Bottom Layer w0.17: H6.11 71.765,82.725 81.403,82.725 83.433,84.755 88.008,84.755 90.319,87.066 92.816,87.066 98.255,92.505 v3(98.255,92.555)
IO29: DD1.19 H6.13 R14.2 SW2.3 SW2.4 | length 76.8
  Top Layer w0.17: R14.2 R14.2@66.75,63.3 ; SW2.3 R14.2@66.75,63.3 ; v1(67.05,66.575) 67.05,63.6 R14.2@66.75,63.3 ; v1@67.075,66.575 67.075,75.495 H6.13 71.765,80.185 73.824,80.185 83.589,89.95 102.2,89.95 104,91.75 DD1.19
  Top Layer w0.254: v1(66.675,55.05) 66.675,51.125 SW2.4
  Bottom Layer w0.254: v1(66.675,55.05) 66.675,64.1 67.05,64.475 v1(67.05,66.575)
IO31: DD1.18 H6.12 | length 35.8
  Top Layer w0.17: H6.12 81.87,90.29 101.815,90.29 103.5,91.975 DD1.18
IO36: DD1.25 H7.4 R39.2 SW6.10 | length 60.2
  Top Layer w0.17: DD1.25 107.375,93.5 107.92,92.955 121.933,92.955 133.95,80.938 133.95,79.377 135.003,79.377 H7.4
  Bottom Layer w0.17: SW6.10 130.35,67.547 133.19,70.387 133.19,76.61 H7.4
  Bottom Layer w0.254: R39.2@130,56.3 130.027,56.3 130.35,56.623 SW6.10
IO37: DD1.23 H7.3 R40.2 SW6.9 | length 65.7
  Top Layer w0.17: DD1.23 106,91.125 107.325,89.8 120.059,89.8 132.184,77.675 136.795,77.675 H7.3
  Bottom Layer w0.17: SW6.9 132.89,69.606 133.53,70.246 133.53,76.142 135.033,77.645 136.765,77.645 H7.3
  Bottom Layer w0.254: SW6.9 132.89,56.41 R40.2
IO38: DD1.27 H7.6 R37.2 SW6.12 | length 63.3
  Top Layer w0.17: DD1.27 108.565,94.5 108.725,94.34 108.781,94.34 108.91,94.211 108.91,94.154 109.11,93.955 121.895,93.955 133.625,82.225 134.425,82.225 135.21,81.44 H7.6
  Bottom Layer w0.17: SW6.12 125.27,63.428 132.51,70.668 132.51,78.47 H7.6
  Bottom Layer w0.254: R37.2@125,56.3 125.27,56.57 SW6.12
IO39: DD1.26 H7.5 R38.2 SW6.11 | length 67.9
  Top Layer w0.17: DD1.26 108.175,94 108.88,93.295 122.074,93.295 134.29,81.079 134.29,80.51 134.585,80.215 136.795,80.215 H7.5
  Bottom Layer w0.17: SW6.11 127.81,65.487 132.85,70.527 132.85,76.751 134.225,78.126 134.225,79.377 135.033,80.185 136.765,80.185 H7.5
  Bottom Layer w0.254: SW6.11 127.81,56.49 R38.2
IO41: DD1.28 H7.7 R36.2 SW6.13 | length 71.6
  Top Layer w0.17: DD1.28 108.503,95 108.663,94.84 108.762,94.84 109.307,94.295 122.057,94.295 131.737,84.615 133.07,84.615 134.93,82.755 136.795,82.755 H7.7
  Bottom Layer w0.17: SW6.13 122.73,62.14 132.17,71.579 132.17,78.611 134.225,80.666 134.225,81.917 135.033,82.725 136.765,82.725 H7.7
  Bottom Layer w0.254: SW6.13 122.73,56.57 R36.2@123,56.3
IO42: DD1.31 H7.8 R35.2 SW6.14 | length 69.2
  Top Layer w0.17: DD1.31 107.105,96.505 109.267,96.505 111.313,96.505 111.333,96.485 112.124,96.485 113.939,98.3 118.533,98.3 127.193,89.64 129.82,89.64 H7.8
  Bottom Layer w0.17: SW6.14 120.375,59.495 120.375,60.265 131.83,71.72 131.83,80.33 H7.8
  Bottom Layer w0.254: R35.2@120,56.3 120.19,56.49 SW6.14
IO43: DD1.32 H7.9 R33.2 SW6.15 | length 78.3
  Top Layer w0.17: DD1.32 111.649,97 113.384,98.735 118.578,98.735 127.333,89.98 130.245,89.98 134.93,85.295 136.795,85.295 H7.9
  Bottom Layer w0.17: SW6.15 128.075,69.735 129.364,69.735 131.49,71.861 131.49,81.722 135.003,85.235 136.735,85.235 H7.9
  Bottom Layer w0.254: SW6.15 117.65,56.623 117.973,56.3 R33.2@118,56.3
IO44: DD1.34 H7.10 R32.2 SW6.16 | length 74.6
  Top Layer w0.17: DD1.34 109.253,98 110.328,99.075 118.719,99.075 127.474,90.32 131.68,90.32 H7.10
  Bottom Layer w0.17: SW6.16 125.875,70.075 129.025,70.075 131.15,72.2 131.15,82.19 H7.10
  Bottom Layer w0.254: R32.2 115.11,56.41 SW6.16
IO45: DD1.37 H7.13 | length 36.5
  Top Layer w0.17: DD1.37 106.5,99.52 107.18,100.2 119.05,100.2 127.64,91.61 133.695,91.61 134.98,90.325 136.745,90.325 H7.13
IO46: DD1.35 H7.11 | length 36.7
  Top Layer w0.17: DD1.35 109.075,98.5 110.095,99.52 118.755,99.52 127.615,90.66 132.105,90.66 134.93,87.835 136.795,87.835 H7.11
IO48: DD1.36 H7.12 R27.1 | length 56
  Top Layer w0.17: DD1.36 109.075,99 109.935,99.86 118.909,99.86 127.769,91 132.246,91 134.186,89.06 H7.12 ; v1(128.525,71.2) 128.525,69.775 R27.1
  Bottom Layer w0.17: v1(128.525,71.2) 128.525,81.234 133.645,86.354 133.645,87.225 H7.12
IO49: DD1.43 H8.8 R24.1 | length 78.3
  Top Layer w0.17: DD1.43 103.5,100.932 106.412,103.845 131.017,103.845 133.902,106.73 H8.8 ; R24.1 v1(123,70.75)
  Bottom Layer w0.17: v1(123,70.75) 123,77.152 132.625,86.777 132.625,103.875 H8.8
IO50: DD1.38 H7.14 R26.1 | length 60.6
  Top Layer w0.17: DD1.38 106,100.825 106.325,101.15 118.581,101.15 127.781,91.95 135.13,91.95 H7.14 ; R26.1 127.05,69.35 v1(127.05,71.175)
  Bottom Layer w0.17: v1(127.05,71.175) 127.05,80.24 133.305,86.495 133.305,89.368 135.48,91.543 H7.14
IO51: DD1.42 H8.5 R25.1 | length 79.6
  Top Layer w0.17: DD1.42 104,100.952 106.498,103.45 131.65,103.45 133.615,105.415 136.795,105.415 H8.5 ; R25.1 v1(125,70.75)
  Bottom Layer w0.17: v1(125,70.75) 125,78.671 132.965,86.636 132.965,93.357 135.003,95.395 136.037,95.395 139.245,98.603 139.245,102.965 H8.5
LED1: D3.2 H5.16 U2.14 | length 97.3
  Top Layer w0.17: D3.2 81.5,144.8 v1(81.5,144.975) ; v1(82.154,119.606) 84.444,119.606 v1(85.05,119) ; v1(84.65,99.75) 84.65,104.057 84.179,104.529 v1(85.05,105.4) ; v1(85,108.075) 85.038,108.113 85.038,113.412 v1(85.075,113.45) ; U2.14 106.725,137.9 111.9,137.9 v1(112.05,137.75)
  Bottom Layer w0.17: v1(82.154,119.606) 82.154,144.279 82.175,144.3 v1(81.5,144.975) 82.2,145.675 109.76,145.675 112.05,143.385 v1(112.05,137.75) ; H5.16 82.292,99.132 84.157,99.132 84.65,99.625 v1(84.65,99.75) ; v1(85,108.075) 85.025,108.05 85.025,105.425 v1(85.05,105.4) ; v1(85.05,119) 85.062,118.988 85.062,113.462 v1(85.075,113.45)
LED2: D4.2 U2.7 | length 46.5
  Top Layer w0.17: U2.7 106.865,130.94 106.865,131.576 107.239,131.95 109.553,131.95 109.928,131.575 110.53,131.575 111.73,132.776 v1(111.73,134.507)
  Top Layer w0.254: D4.2 83.925,144.225 v1(83.925,144.45)
  Bottom Layer w0.17: v1(83.925,144.45) 83.925,144.325 84.045,144.205 110.749,144.205 111.205,143.749 111.205,135.07 111.73,134.545 v1(111.73,134.507)
NetC13_1: C13.1 Q2.1 U2.2 | length 6.6
  Top Layer w0.17: C13.1 99.925,130.775 99.925,129.525 Q2.1 102.875,129.1 103.475,129.7 U2.2
NetC14_2: C14.2 Q2.3 U2.3 | length 12.2
  Top Layer w0.17: C14.2 96.225,127.575 97.975,127.575 Q2.3 ; Q2.3@98.025,127.375 99.025,126.375 101.225,126.375 101.975,127.125 101.975,127.425 104.125,129.575 U2.3 ; Q2.3@98.5,127.4 98.5,127.65 Q2.3@98.765,127.915
NetD1_1: D1.1 R5.1 | length 9
  Top Layer w0.254: R5.1 101.475,62 101.823,61.652 101.823,55.627 103.25,54.2 D1.1
NetD1_3: D1.3 R7.1 | length 5.9
  Top Layer w0.254: D1.3 105.173,57.423 105.173,60.898 106.275,62 R7.1
NetD1_4: D1.4 R6.1 | length 5.3
  Top Layer w0.254: D1.4 103.673,57.423 103.673,61.673 R6.1
NetD2_1: D2.1 R3.2 | length 2.4
  Top Layer w0.17: R3.2 D2.1
NetD3_1: D3.1 R4.2 | length 2.4
  Top Layer w0.17: R4.2 D3.1
NetD4_1: D4.1 R8.2 | length 2.4
  Top Layer w0.17: R8.2 D4.1
NetD5_2: D5.2 R16.2 | length 2.4
  Top Layer w0.254: D5.2 R16.2
NetD6_2: D6.2 R17.2 | length 2.4
  Top Layer w0.254: D6.2 R17.2
NetD7_2: D7.2 R22.2 | length 2.4
  Top Layer w0.254: D7.2 R22.2
NetD8_2: D8.2 R23.2 | length 2.4
  Top Layer w0.254: D8.2 R23.2
NetD9_2: D9.2 R24.2 | length 2.4
  Top Layer w0.254: D9.2 R24.2
NetD10_2: D10.2 R25.2 | length 2.4
  Top Layer w0.254: D10.2 R25.2
NetD11_2: D11.2 R26.2 | length 2.4
  Top Layer w0.254: D11.2 R26.2
NetD12_2: D12.2 R27.2 | length 2.4
  Top Layer w0.254: D12.2 R27.2
NetH1_1: H1.1 R5.2 | length 3.6
  Top Layer w0.254: R5.2 101.46,64.21 H1.1
NetH1_3: H1.3 R6.2 | length 3.5
  Top Layer w0.254: R6.2 H1.3
NetH1_5: H1.5 R7.2 | length 3.5
  Top Layer w0.254: R7.2 106.54,64.04 H1.5
NetH4_1: H4.1 H5.9 | length 26.1
  Top Layer w0.17: H4.1 76.515,124.425 76.515,109.945 H5.9
NetH4_2: H4.2 H5.11 | length 29.4
  Top Layer w0.17: H4.2 68.98,127.354 76.175,120.159 76.175,107.802 79.227,104.75 H5.11@79.73,104.75
NetH4_3: H4.3 H5.13 | length 37.6
  Top Layer w0.17: H4.3 70.325,130.765 68.833,130.765 67.925,129.857 67.925,127.928 75.825,120.028 75.825,105.555 H5.13
NetH4_4: H4.4 H5.15 | length 38.5
  Top Layer w0.17: H4.4 67.585,130.565 67.585,127.787 75.475,119.897 75.475,103.365 H5.15
NetH4_5: H4.5 H5.5 | length 26.1
  Top Layer w0.17: H4.5 77.28,128.74 77.28,114.26 H5.5
NetH4_6: H4.6 H5.7 | length 30.7
  Top Layer w0.17: H4.6 70.255,133.225 71.975,133.225 76.94,128.26 76.94,112.06 H5.7
NetH4_7: H4.7 H5.1 | length 23.6
  Top Layer w0.17: H4.7 77.96,130.6 77.96,118.66 H5.1
NetH4_8: H4.8 H5.3 | length 28.2
  Top Layer w0.17: H4.8 70.295,135.725 72.125,135.725 77.62,130.23 77.62,116.46 H5.3
NetQ1_1: Q1.1 R2.2 | length 2.9
  Top Layer w0.17: Q1.1 107.05,83.65 108.235,84.835 108.885,84.835 R2.2
NetR1_2: R1.2 U1.3 | length 4.6
  Top Layer w0.17: R1.2 79.05,133.45 79.415,133.085 79.415,131.725 81.025,130.115 U1.3
NetR10_2: R10.2 U1.7 | length 2.7
  Top Layer w0.17: U1.7 86.69,131.45 R10.2
NetR12_2: R12.2 U2.1 | length 7.7
  Top Layer w0.17: R12.2 100.665,137.135 100.665,133.435 102.825,131.275 U2.1
RGB0: DD1.41 H1.6 H8.6 | length 77.5
  Top Layer w0.17: DD1.41 104.5,100.971 106.439,102.91 129.575,102.91 ; v5@129.575,102.1 129.575,102.91 ; H8.6 134.2,102.91 129.575,102.91
  Bottom Layer w0.17: H1.6 130.925,94.405 130.925,101.3 130.25,101.975 v5(129.55,101.975)
RGB1: DD1.40 H1.4 H8.3 | length 85.3
  Top Layer w0.17: DD1.40 105,100.925 106.475,102.4 127.059,102.4 128.384,101.075 133.13,101.075 134.93,102.875 136.795,102.875 H8.3 136.62,100.25 131.75,100.25 v5(129.95,98.45)
  Bottom Layer w0.17: H1.4 129.95,95.97 v5(129.95,98.45)
RGB2: DD1.39 H1.2 H8.4 | length 74.5
  Top Layer w0.17: DD1.39 105.5,100.944 106.506,101.95 127.028,101.95 128.5,100.478 ; v5(128.5,98.5) 128.5,100.478 ; H8.4 135.329,101.65 134.384,100.705 131.13,100.705 130.903,100.478 128.5,100.478
  Bottom Layer w0.17: H1.2 128.5,97.06 v5(128.5,98.5)
SPI_MISO: DD1.14 H2.15 H5.2 U1.2 U2.12 | length 110.5
  Top Layer w0.17: U1.2 81.725,131.385 83.61,129.5 88.182,129.5 89.087,130.405 91.38,130.405 91.525,130.55 ; H5.2 84.715,116.89 91.495,123.67 91.495,130.135 91.525,130.165 91.525,130.55 ; DD1.14 101.5,92.225 101.05,91.775 93.45,91.775 92.854,92.371 92.854,106.148 93.595,106.889 93.595,121.467 95.25,123.122 v3(95.25,131.5) 92.475,131.5 91.525,130.55 ; v3(107,133.875) 107,134.337 108.025,135.362 U2.12
  Bottom Layer w0.17: H2.15 74.245,118.115 81.045,118.115 H5.2 ; v3(95.25,131.5) 97.505,133.755 106.88,133.755 v3(107,133.875)
SPI_MOSI: DD1.17 H2.13 H5.4 U1.5 U2.13 | length 97.7
  Top Layer w0.17: H5.4 82.745,114.35 83.395,115 89.932,115 ; U1.5 86.78,129 86.805,128.975 v3(89.925,128.975) ; v3(92.8,130.35) 92.8,117.868 89.932,115 ; DD1.17 103,92 101.63,90.63 93.152,90.63 91.7,92.082 91.7,113.55 90.25,115 89.932,115 ; v3(106.075,134.8) 106.8,134.8 107.375,135.375 U2.13
  Bottom Layer w0.17: H2.13 74.245,115.575 81.045,115.575 H5.4 ; v3(89.925,128.975) 89.925,130.175 90.1,130.35 v3(92.8,130.35) 92.8,130.8 96.8,134.8 v3(106.075,134.8)
SPI_SCK: DD1.15 H2.11 H5.6 U1.6 U2.11 | length 115.5
  Top Layer w0.17: U1.6 86.975,130.115 87.605,130.745 91.239,130.745 93.494,133 v3(98.25,133) ; v3(94.25,130.25) 93.255,129.255 93.255,107.03 92.425,106.2 92.425,92.319 93.394,91.35 101.225,91.35 102,92.125 DD1.15 ; v3@108.5,133 108.325,133.175 v3(108.325,133.35) 108.587,133.612 108.587,136.613 U2.11
  Bottom Layer w0.17: H2.11 74.245,113.035 81.045,113.035 H5.6 84.345,113.885 84.345,120.345 v3(94.25,130.25) 95.5,130.25 v3(98.25,133) 107.975,133 v3(108.325,133.35)
SPI_SS: H3.4 H5.8 U2.10 | length 43.6
  Top Layer w0.17: H3.4 109.285,118.205 109.285,129.715 108.675,130.325 U2.10
  Bottom Layer w0.17: H5.8 100.35,109.27 H3.4
SRST: R20.2 SW4.3 SW4.4 U2.4 | length 27.4
  Top Layer w0.17: SW4.3 92.566,136.951 92.566,139.666 94.2,141.3 93.835,141.665 93.835,142.961 92.056,144.74 SW4.4 ; R20.2 94.615,140.935 98.695,140.935 102.345,137.285 102.345,135.495 104.775,133.065 U2.4
SW1: H8.14 R13.2 SW1.3 SW1.4 U2.6 | length 210.1
  Top Layer w0.17: SW1.3 R13.2@74.75,63 ; R13.2 74.75,63.05 R13.2@74.75,63 ; U2.6 106.215,130.94 106.215,131.576 107.089,132.45 109.4,132.45 v1(110.325,133.375) 110.325,134.4 110.25,134.475 111.125,135.35 112.375,135.35 114.075,133.65 v1(114.075,131.05) ; v1(110.455,143.457) 110.455,145.281 110.5,145.325 108.6,147.225 73.575,147.225 65.046,138.696 65.046,58.354 65.275,58.125 67.525,58.125 67.875,58.475 67.875,60.528 70.182,62.835 74.585,62.835 R13.2@74.75,63 ; v1(130.75,116.05) 132.45,114.35 H8.14
  Top Layer w0.254: SW1.4 SW1.3
  Bottom Layer w0.17: v1@110.375,133.375 110.375,143.377 v1(110.455,143.457) ; v1(114.075,131.05) 115.75,131.05 v1(130.75,116.05)
SWCLK: U2.20
SWDIO: U2.19
USB_DM: U2.17 X1.2 | length 5.8
  Top Layer w0.17: X1.2 104.713,142.338 104.713,136.763 U2.17
USB_DP: U2.18 X1.3 | length 5.8
  Top Layer w0.17: X1.3 104.062,142.338 104.062,136.763 U2.18
VCC: C12.2 C15.2 C20.2 C25.2 DD1.5 DD1.30 H2.9 R11.2 R34.2 TP6.1 U5.2 | length 141.9
  Top Layer w0.17: v1(69.75,119.875) 73.125,119.875 v1(73.35,119.65) ; v1(83.375,120.35) 85.45,120.35 v1(86.025,119.775) ; v1@86.475,114.125 86.5,114.15 88.2,114.15 89.325,113.025 v1(89.325,108.4) ; v1(97.75,98) 98.75,97 DD1.5 ; DD1.30 111,96 111.25,95.75 112.7,95.75 R34.2
  Top Layer w0.254: R34.2 112.95,96.05 114.15,97.25 v1(116,97.25) ; U5.2 117.5,137 117.3,136.8 R11.2 117.25,134.7 TP6.1 117.25,122.294 124,115.544 v1(124,107.75)
  Bottom Layer w0.17: v1(69.75,119.875) 69.75,119.868 69.255,119.373 69.255,111.303 70.003,110.555 71.735,110.555 H2.9 ; v1(73.35,119.65) 74.822,119.65 75.572,118.9 82.455,118.9 82.88,119.325 82.88,119.848 83.375,120.343 v1(83.375,120.35) ; v1(86.025,119.775) 86.025,117.175 86.45,116.75 v1(86.45,114.15) ; v1(89.325,108.4) 89.505,108.58 96.345,108.58 96.857,108.068 96.857,98.893 v1(97.75,98) 97.775,98.025 99.075,98.025 C15.2 C20.2 99.3,95.515 101.32,93.495 109.117,93.495 111,95.378 v6(111,95.75)
  Bottom Layer w0.254: v1(116,97.25) 124,105.25 v1(124,107.75)
VCC_2V5: C19.2 C24.2 C29.2 DD1.24 R31.1 TP5.1 | length 62.7
  Top Layer w0.17: DD1.24 106.5,91.475 107.425,90.55 C29.2 C24.2 C19.2
  Top Layer w0.254: C19.2 111.3,90.55 v1(112,91.25) ; v1(126.5,107.75) 126.5,122.5 137.45,133.45 R31.1 137.45,133.5 TP5.1
  Bottom Layer w0.254: v1(112,91.25) 126.5,105.75 v1(126.5,107.75)
VCC_PLL: C30.2 C31.2 DD1.29 R34.1 | length 10.9
  Top Layer w0.17: DD1.29 109,95.5 109.425,95.075 v1@109.585,95.075 ; v1(109.7,95.075) v1@109.585,95.075 ; R34.1 114.55,95.95 113.595,94.995 109.505,94.995 v1@109.585,95.075
  Bottom Layer w0.17: C30.2 C31.2 108.525,95.075 v1(109.7,95.075)
VCCIO0: C18.2 C23.2 C28.2 DD1.33 R30.1 TP4.1 | length 26.7
  Top Layer w0.17: DD1.33 107.125,97.475 110.525,97.475 110.95,97.9 v1(110.95,97.95) ; v3(118.25,106.725) 118.25,108.45 118.275,108.475 TP4.1 R30.1
  Bottom Layer w0.17: v1(110.95,97.95) 108.95,97.95 108.475,97.475 C28.2 C18.2 C23.2 108.675,100.475 112.475,100.475 118,106 118.25,106 v3(118.25,106.725)
VCCIO1: C17.2 C22.2 C27.2 DD1.22 H2.10 R18.1 R19.1 R21.1 R29.1 TP3.1 | length 128.4
  Top Layer w0.17: H2.10 71.765,107.985 71.765,106.253 72.573,105.445 73.497,105.445 74.825,104.117 74.825,102.283 85.108,92 v5(86.25,92) ; R21.1 v1(84.3,64.45) ; v1(87.75,88.75) 89.75,86.75 v1(89.75,85.5) 89.875,85.625 95.375,85.625 v5(95.5,85.75) ; DD1.22 105.5,90.318 106,89.818 v3(106,89.75) ; v3(120,106.5) 120.577,107.077 120.577,107.752 121.25,108.424 TP3.1 R29.1
  Top Layer w0.254: v1(120,110.75) 121.05,110.75 R29.1
  Bottom Layer w0.17: v1(84.3,64.45) 83.482,63.632 82.243,63.632 80.085,65.79 80.085,80.869 83.631,84.415 88.665,84.415 v1(89.75,85.5) ; v5(86.25,92) 87.75,92 ; v1(87.75,88.75) 87.75,92 ; R18.1 89.085,95.885 89.085,93.335 87.75,92 ; v5(95.5,85.75) 97.45,85.75 C27.2 C22.2 C17.2 ; v3(106,89.75) 105.975,89.775 105.975,91.325 C17.2 ; v3(120,106.5) 120,103.682 108.093,91.775 105.975,91.775 C17.2
  Bottom Layer w0.254: R19.1 119.05,114.45 120,113.5 v1(120,110.75)
VCCIO2: C16.2 C21.2 C26.2 DD1.1 H2.6 R28.1 TP2.1 | length 75.4
  Top Layer w0.17: H2.6 71.765,102.905 73.722,102.905 85.602,91.025 86.75,91.025 87.15,91.425 v1(87.15,104.775) ; v1(93.58,105.38) 99.72,105.38 100.2,104.9 C16.2 ; DD1.1 100.4,101.55 C26.2 C21.2 C16.2 ; TP2.1 R28.1 114.885,110.585 106.535,110.585 C16.2
  Bottom Layer w0.17: v1(87.15,104.775) 87.218,104.775 87.823,105.38 v1(93.58,105.38)
VUSB: C7.2 C8.2 C9.2 D2.2 H6.2 H7.2 H8.2 U3.3 U4.3 U5.3 X1.1 | length 221.9
  Top Layer w0.17: D2.2 77.565,143.865 77.565,145.318 78.43,146.182 v1@78.43,146.43 ; 119.8,140.45 122.7,140.45 C7.2 ; C8.2 133,140.75 133,142.4
  Top Layer w0.25: v1@78.553,146.5 78.747,146.306 92.446,146.306 94.947,143.805 104.97,143.805 105.3,143.475 X1.1
  Top Layer w0.254: X1.1 112.75,142.4 ; C9.2 112.75,142.4 ; v3@118.125,142.125 118.125,141.875 119.37,140.63 119.62,140.63 119.8,140.45 U5.3 ; U3.3 129.477,139.248 129.477,141.773 128.85,142.4 ; H7.2 136.757,75.083 138.549,75.083 141.95,78.484 141.95,99.375 ; H8.2 136.757,97.833 140.361,97.833 141.903,99.375 141.95,99.375 ; 112.75,142.4 128.85,142.4 ; 128.85,142.4 133,142.4 137.1,142.4 140.05,139.45 U4.3 140.05,138.4 141.95,136.5 141.95,99.375
  Bottom Layer w0.254: H6.2 67.883,99.277 67.883,129.874 67.903,129.894 67.903,131.486 67.883,131.506 67.883,132.414 67.903,132.434 67.903,134.026 67.883,134.046 67.883,134.954 67.903,134.974 67.903,136.566 67.883,136.586 67.883,137.494 67.903,137.514 67.903,139.106 67.883,139.126 67.883,140.034 74.155,146.306 v1(78.553,146.306)
  other v3: 118,142
pads on no net: H2.8 H2.12 H4.9 H8.13 SW1.2 SW1.5 SW2.2 SW2.5 SW3.2 SW3.5 SW4.2 SW4.5 SW5.2 SW5.5 U3.4 U4.4 U5.4 X1.4 X1.MT1 X1.MT2 X1.P$1 X1.P$2
copper on no net:
  other v2: 69,51 112.25,65.75 75.75,96.25 90.5,112.25 70,122.5 136.5,123.75 83.75,124.75 111.625,129.775 97.325,130.725 89.85,140.675

## Polygon pours and split planes (outlines as drawn)
GND on Top Layer "GND_L01_P000" (solid, pour order 0): 64.007,47.916 144.007,47.916 144.007,147.916 64.007,147.916
GND on Bottom Layer "GND_L02_P001" (solid, pour order 1): 64.007,47.916 144.007,47.916 144.007,147.916 64.007,147.916

## Keep-outs
Keep-Out Layer:
  the board outline again, w0.2

## Silkscreen, mask and mechanical layers (free items; w line width, h text height)
Top Overlay:
  lines w0.254: 79,96.75 82.5,96.75 ; 79,118.75 82.5,118.75
  text "RST" at 86.25,139 h1.52 r90
  text "CDN / IRST / GND / ISS / FSS / 3.3" at 111.25,121 h1.52 r90
  text "4+2 FLASH / 4+6 ICE / 5+3 ICE MASTER" at 112.75,119.25 h1.52
  text "CDN / IRST / GND / ISS / SS / FSS" at 111.25,108 h1.52 r90
  text "Lattice iCE5LP" at 101.75,103.25 h1.52
  text "GND / NC / P48 / P46 / P44 / P42 / P40 / 3.3" at 139.5,98.75 h1.52
  text "FSS / ISS / NC / VIO1 / NC / VIO2 / GND / GND" at 60.25,98.5 h1.52
  text "MISO / MOSI / SCK / SS / IRST / CDN / CLK25 / LED1" at 84,98.5 h1.52
  text "GND / SW1 / P47 / P45 / P43 / P41 / P39 / VUSB" at 128,98.5 h1.52
  text "Logic Ch0-Ch7" at 77.75,98 h1.52 r90
  text "25MHz P20 ->" at 85.75,82.5 h1.52
  text "3.3 / P2 / P4 / P9 / P11 / P13 / P19 / GND" at 64.25,75.75 h1.52
  text "VUSB / P3 / P6 / P10 / P12 / P18 / P21 / GND" at 74.75,75.75 h1.52
  text "GND / P38 / P36 / P34 / P31 / P27 / P25 / VUSB" at 127.75,75.75 h1.52
  text "GND / P37 / P35 / P32 / P28 / P26 / P23 / 3.3" at 139.5,75.75 h1.52
  text "48 / 47 / 46 / 45 / 43 / 42 / 38 / 36" at 130,71.75 h1.2 r90
  text "R-P39-RGB2 / G-P40-RGB1 / B-P41-RGB0" at 99.875,66.125 h1 r90
  text "34 32 31 28 27 26 25 23" at 114.3,61 h1
  text "RST" at 83.525,48.575 h1.2
  text "STM" at 75.225,48.525 h1.2
  text "P19" at 67.5,48.5 h1.2
  text "P21" at 91.5,48.5 h1.2
Bottom Overlay:
  drawing of 2056 lines, arcs and shapes, not listed
  text "iCE5LP 2K DKE v1.1 / by Yevhenii Popravka   / Kyiv May 2017" at 101.45,49.1 h1.52

## Text inside footprints (layer, text, board x,y; h text height)
H4: Top Overlay "10" at 67.71,138.945 h1.02 r90; Mechanical 14 "10" at 67.71,138.945 h1.02 r90
SW6: Top Overlay "1" at 114.983,52.833 h1; Top Overlay "3" at 119.809,52.833 h1; Top Overlay "2" at 117.269,52.833 h1; Top Overlay "5" at 124.889,52.833 h1; Top Overlay "4" at 122.349,52.833 h1; Top Overlay "6" at 127.429,52.833 h1; Top Overlay "7" at 129.969,52.833 h1; Top Overlay "8" at 132.509,52.833 h1; Top Overlay "ON" at 114.221,57.278 h1; Mechanical 14 "1" at 114.983,52.833 h1; Mechanical 14 "3" at 119.809,52.833 h1; Mechanical 14 "2" at 117.269,52.833 h1; Mechanical 14 "5" at 124.889,52.833 h1; Mechanical 14 "4" at 122.349,52.833 h1; Mechanical 14 "6" at 127.429,52.833 h1; Mechanical 14 "7" at 129.969,52.833 h1; Mechanical 14 "8" at 132.509,52.833 h1; Mechanical 14 "ON" at 114.221,57.278 h1